# Altium PCB NBP6 Altera Stratix BGA780 Rev1.00.PcbDoc (part 1 of 3)
Units mm, origin at the board's own origin, x right, y up, seen from the top; angles counter-clockwise.
Board outline 69 x 80.99 mm, 6 copper layers (Top Layer, Upper, lower, VCC_PLANE, GND_PLANE, Bottom Layer); 92 components, 279 nets, 1271 pads, 560 vias.
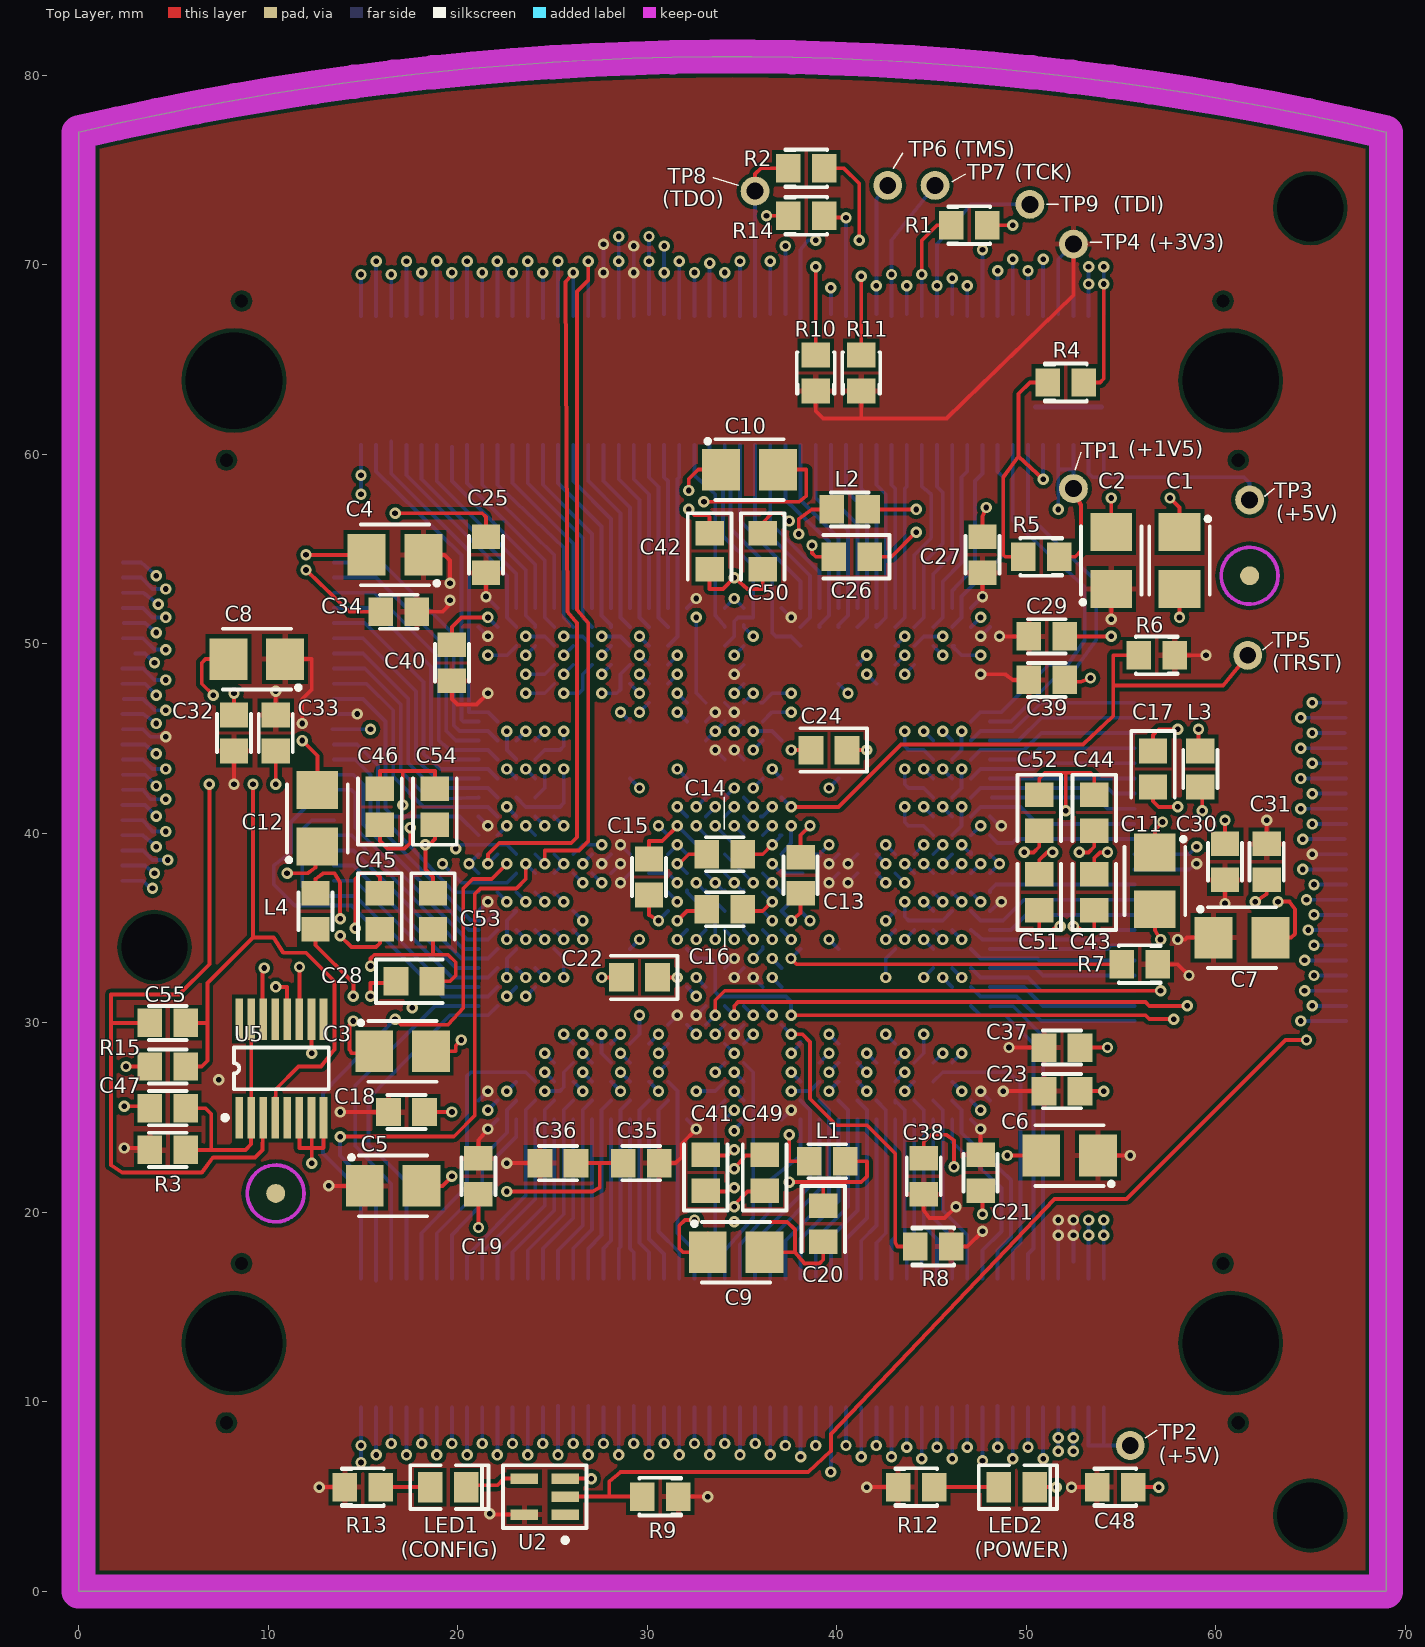
[diagram p0: Top Layer view]
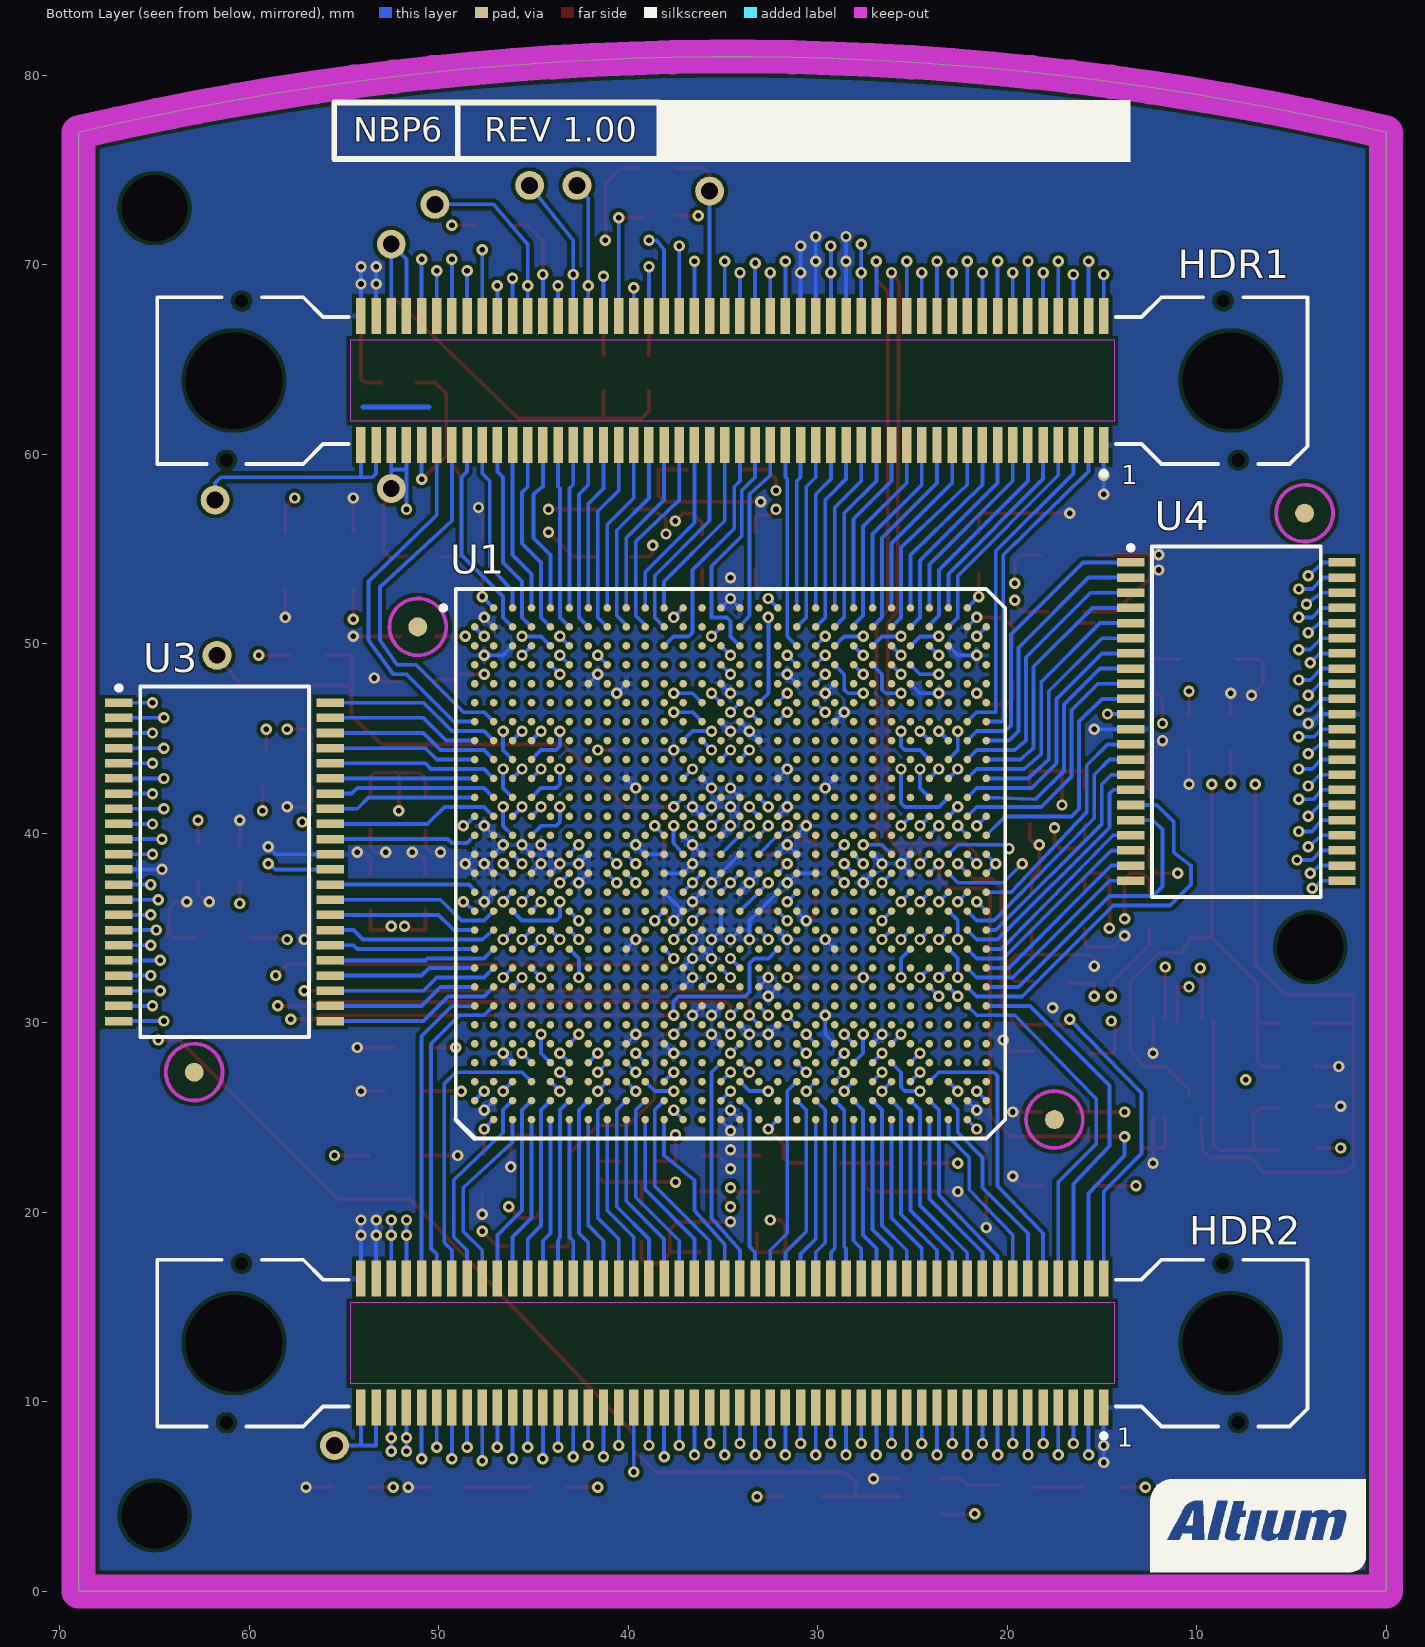
[diagram p1: Bottom Layer view, seen from below]
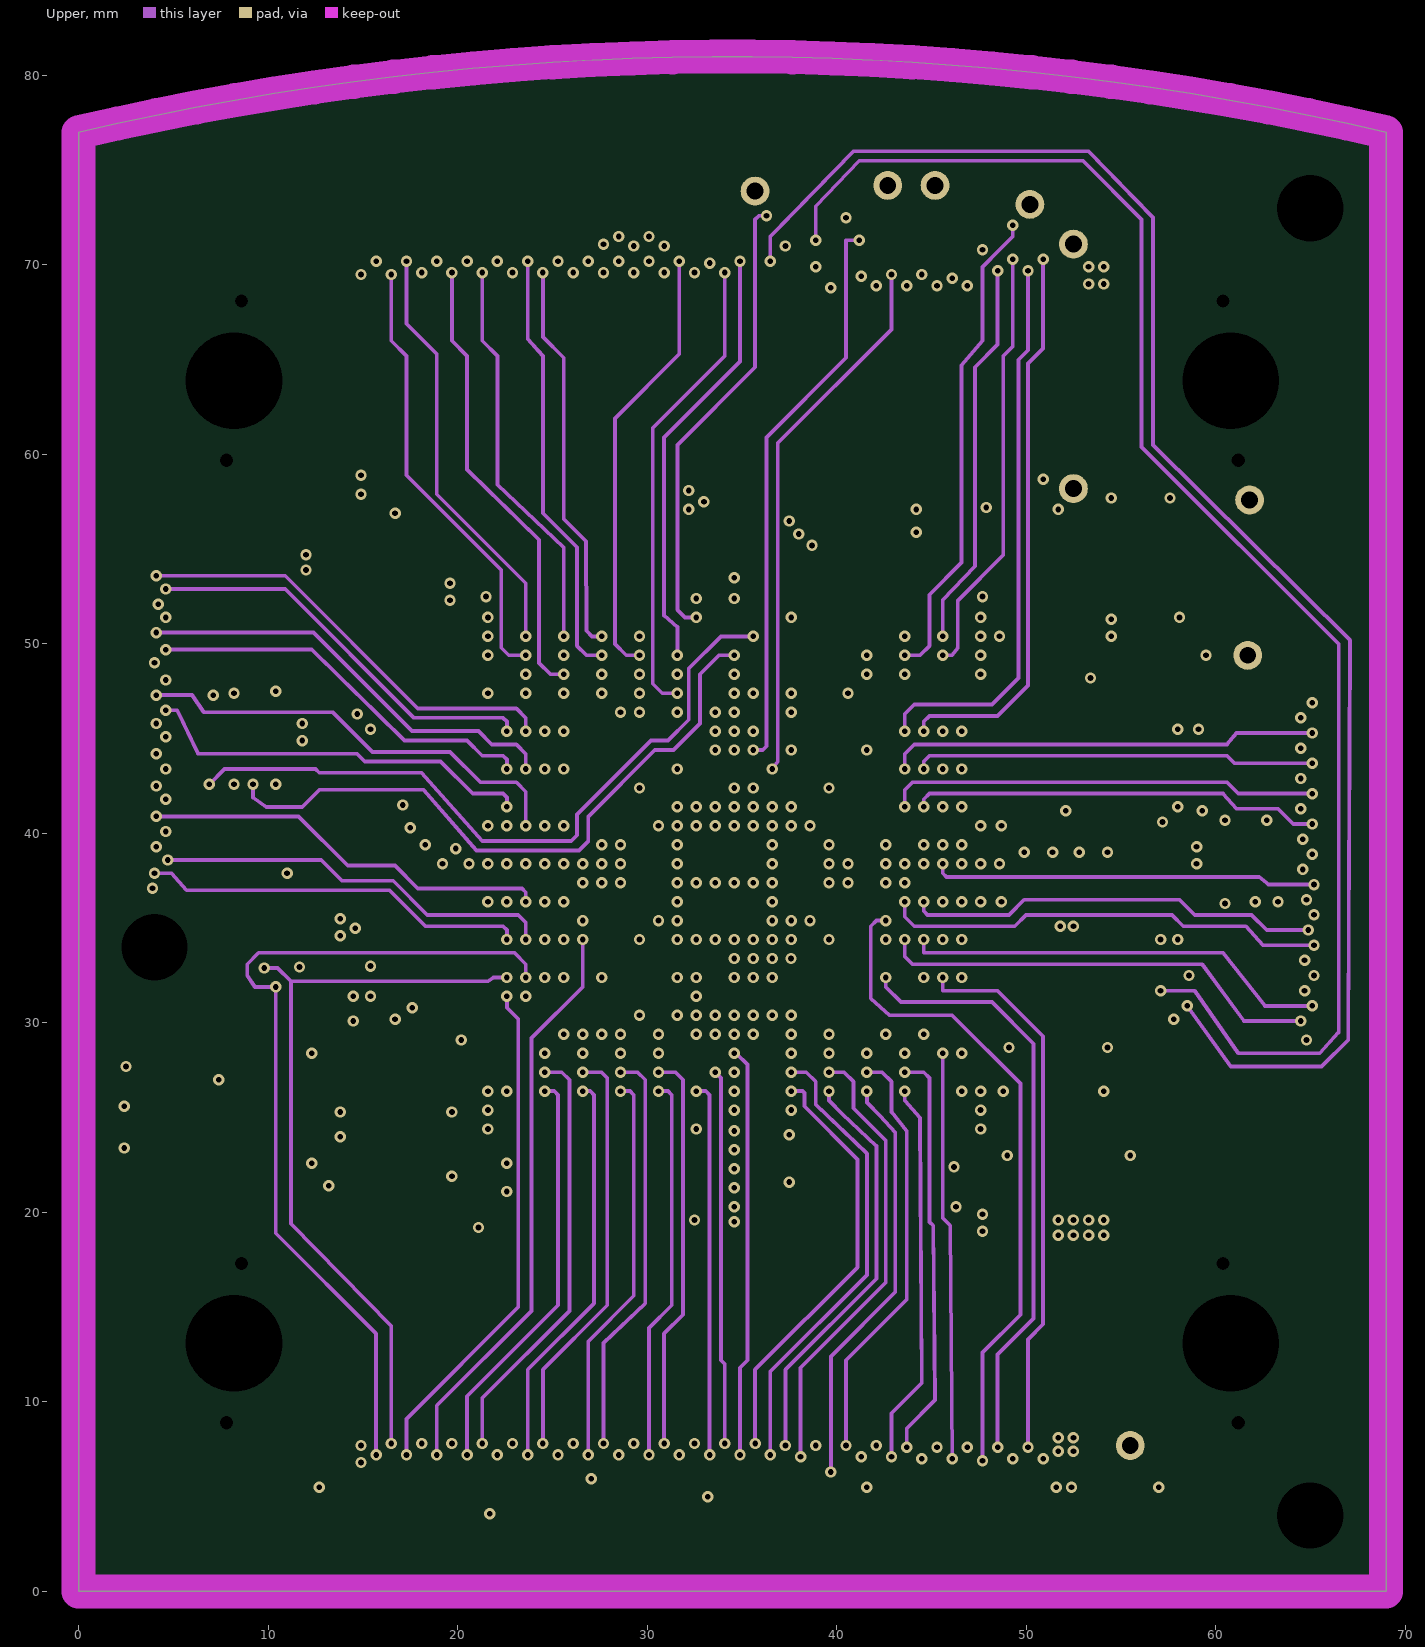
[diagram p2: Upper]
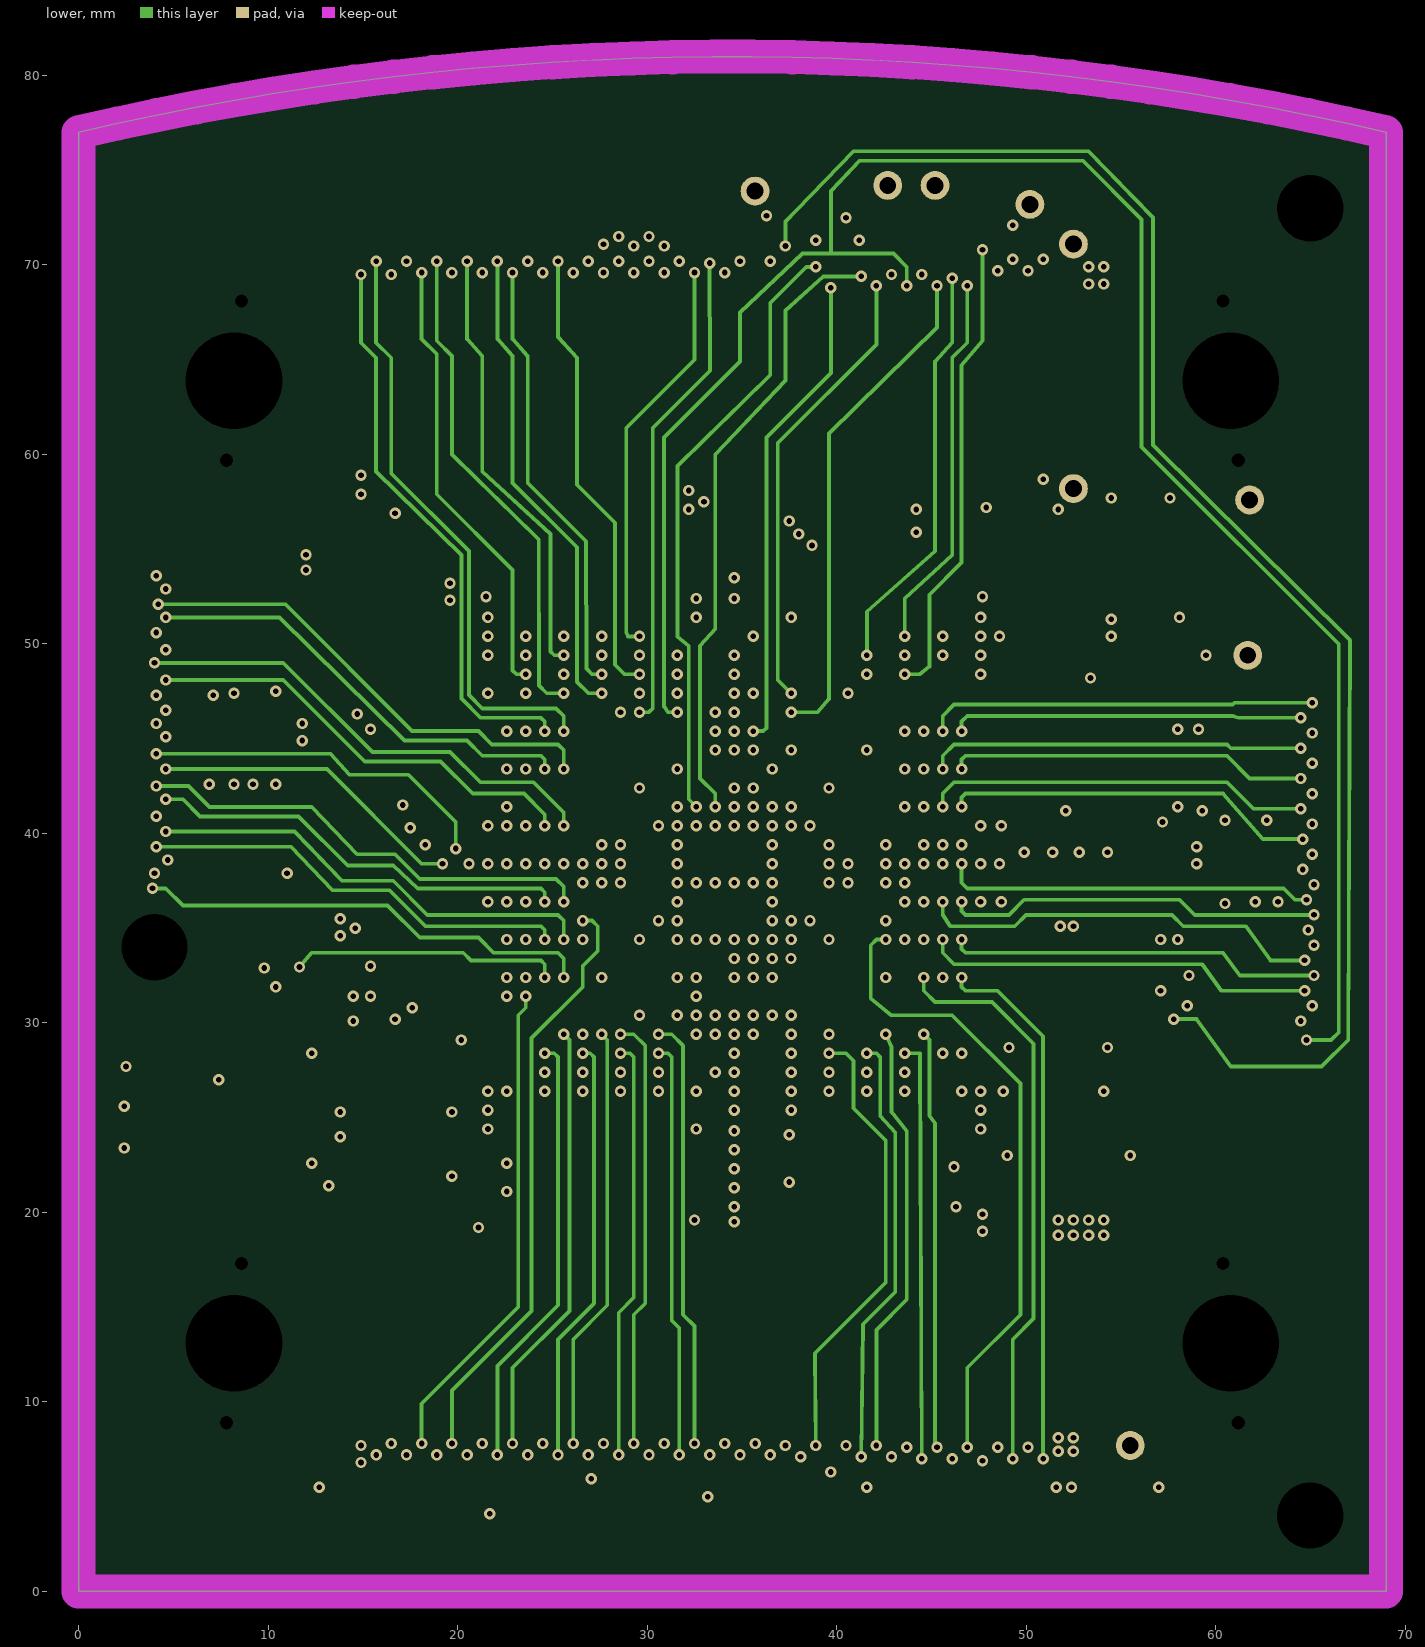
[diagram p3: lower]
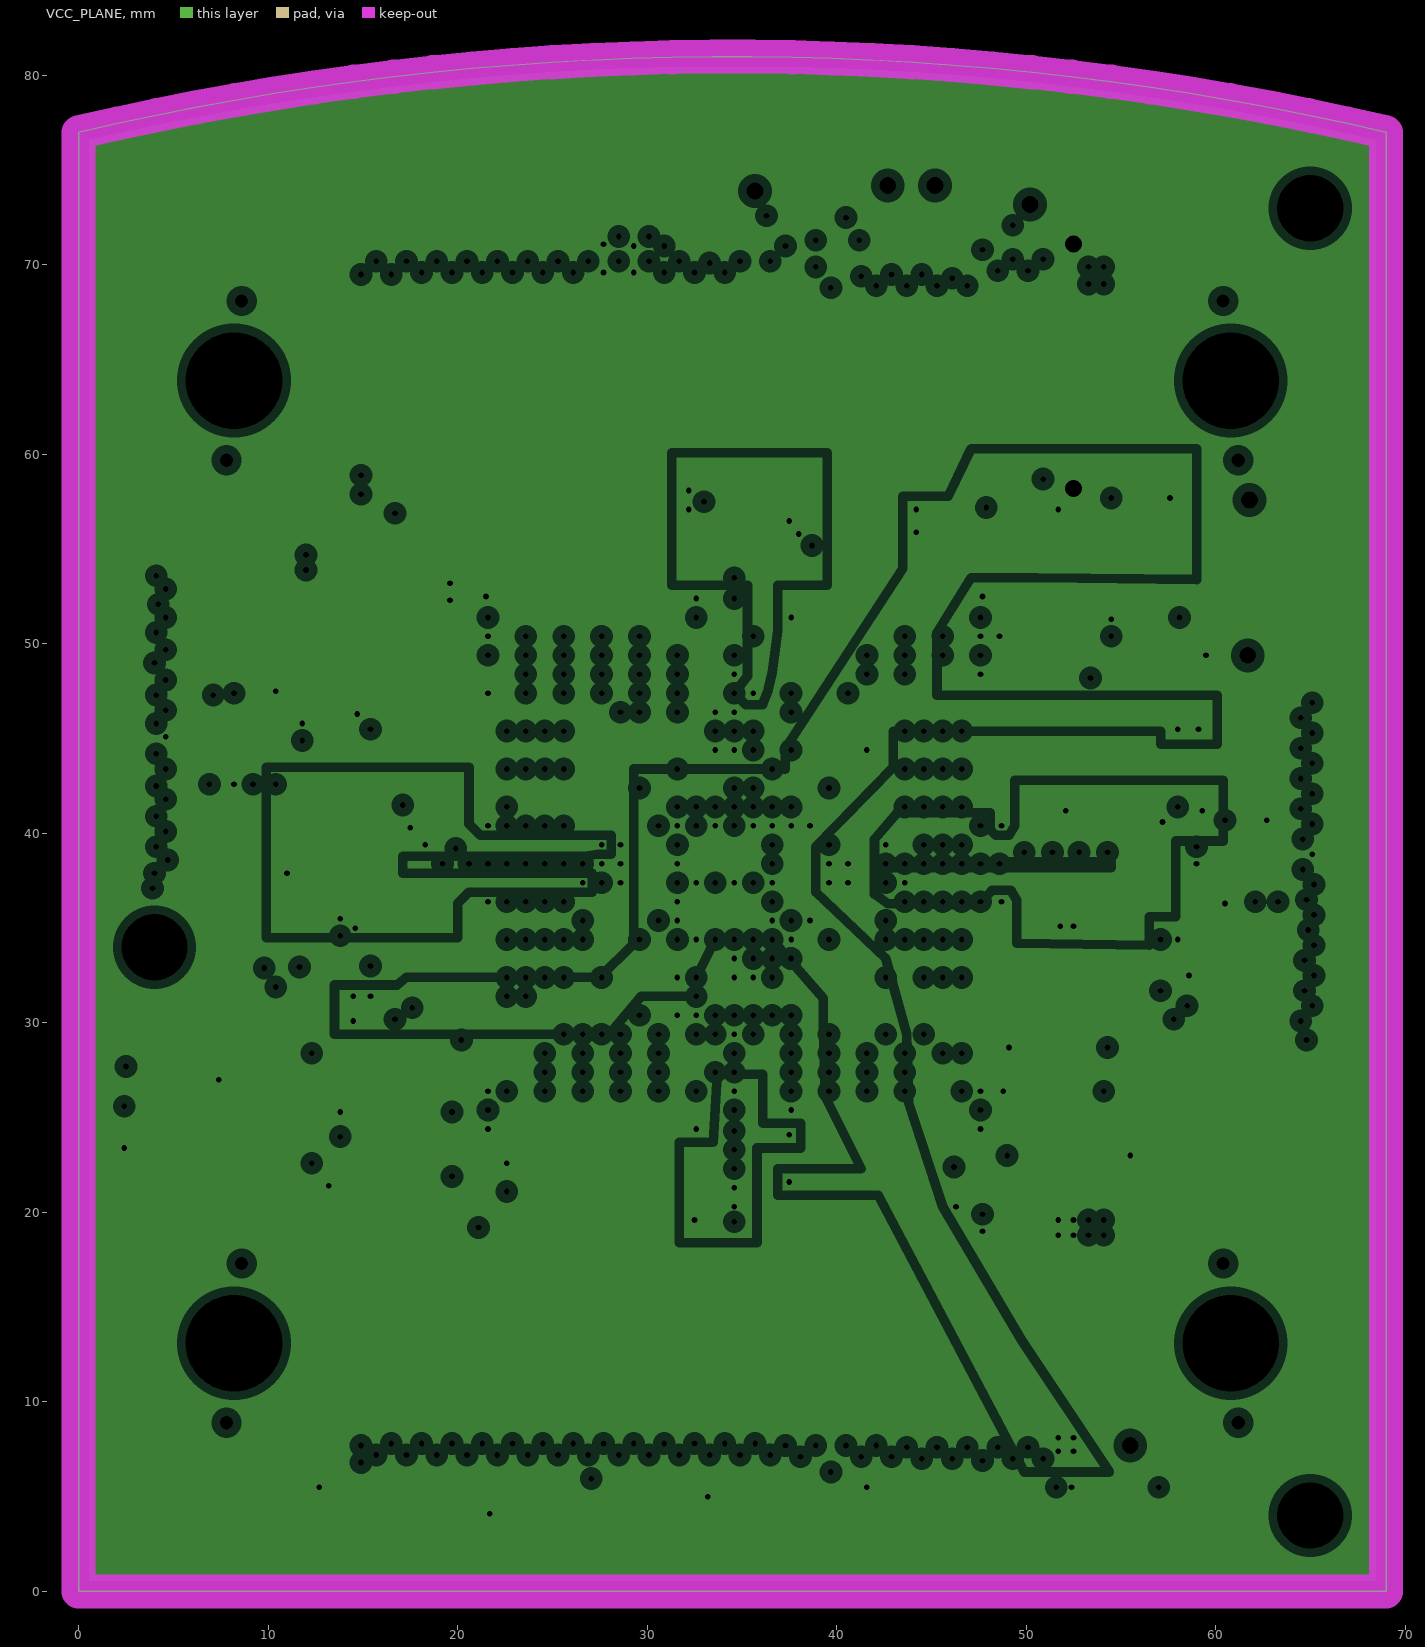
[diagram p4: VCC_PLANE, clearances drawn from the general rule]
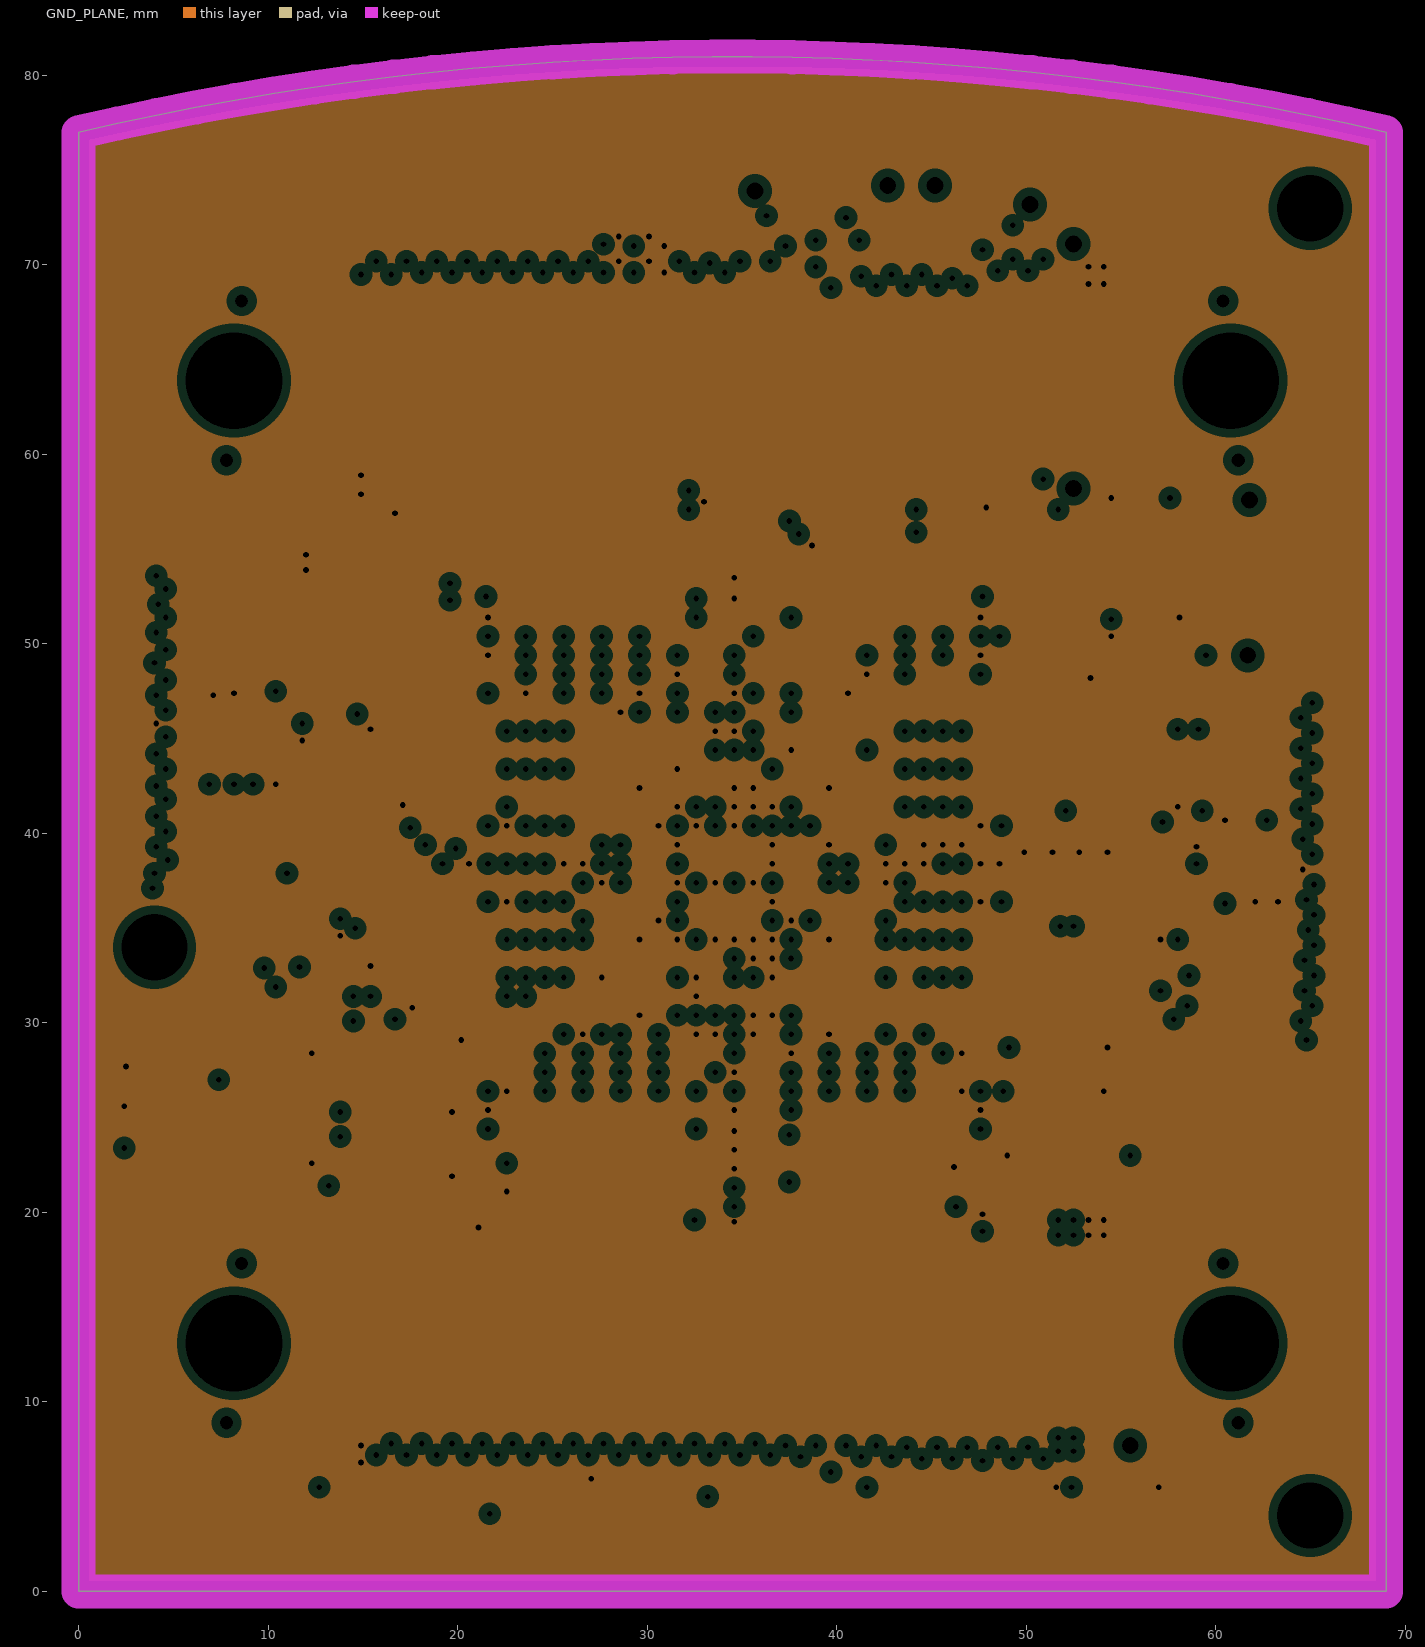
[diagram p5: GND_PLANE, clearances drawn from the general rule]

## Layer stack, top to bottom
Top Layer: signal copper 0.0356
Dielectric: core 0.32, FR-4, Dk 4.8
Upper: signal copper 0.0356
Dielectric: prepreg 0.32, FR-4, Dk 4.8
lower: signal copper 0.0356
Dielectric: core 0.32, FR-4, Dk 4.8
VCC_PLANE: plane copper 0.0356, net (Multiple Nets)
Dielectric: prepreg 0.32, FR-4, Dk 4.8
GND_PLANE: plane copper 0.0356, net GND
Dielectric: core 0.32, FR-4, Dk 4.8
Bottom Layer: signal copper 0.0356

## Board outline
0,0 0.001,77 cw(c34.5,-69.801) 69,77 69,0

## Design rules (kind name [scope] priority, off if disabled: settings)
Clearance Clearance_Polygons [InPolygon] p1: gap=0.2
ComponentClearance [All] p1: gap=0.2 collisioncheckmode=3 verticalgap=0.254 showdistances=FALSE
FabricationTestPointUsage TestPointUsage [All] p1 off: valid=0 allowmultiple=FALSE
FabricationTestpoint Testpoint [All] p1 off: side=3 testpointundercomponent=TRUE minsize=1.016 maxsize=2.54 preferedsize=1.524 minholesize=0 maxholesize=1.016 preferedholesize=0.813 testpointgrid=0.025 allowsidetop=TRUE allowsidebottom=TRUE usegrid=TRUE gridtolerance=0
HoleSize [All] p1: absolutevalues=TRUE maxlimit=5.2 minlimit=0.25 maxpercent=80.000 minpercent=20.000
PlaneClearance [All] p1: clearance=0.45
PlaneConnect [All] p1: planeconnectstyle=Direct reliefexpansion=0.5 reliefentries=4 reliefconductorwidth=0.25 reliefairgap=0.25
PolygonConnect [All] p1: connectstyle=Relief reliefconductorwidth=0.3 reliefentries=4 polygonreliefangle="90 Angle"
RoutingVias [All] p1: holewidth=0.3 width=0.6 viastyle="Through Hole" minholewidth=0.3 minwidth=0.6 maxholewidth=0.5 maxwidth=1.4
SMDNeckDown [All] p1: percent=100.000
SilkscreenOverComponentPads [All] p1: minsilkscreentomaskgap=0.254
SolderMaskExpansion SolderMaskExpansion_Vias [IsVia] p1: expansion=-0.4
SolderMaskExpansion [All] p2: expansion=0.1
Width [All] p1: maxlimit=1.4 minlimit=0.2 preferedwidth=0.2
21 further rules are at their usual default settings.

## Components (designator, comment, footprint, x,y, rotation, side; value= is the part's Value field where it differs from the comment)
C1 "10uF" MCCT-B 58.1,54.4 r270 top
C2 "10uF" MCCT-B 54.5,54.4 r90 top
C3 "10uF" MCCT-B 17.1,28.5 r0 top
C4 "10uF" MCCT-B 16.7,54.7 r180 top
C5 "10uF" MCCT-B 16.6,21.4 r0 top
C6 "10uF" MCCT-B 52.3,23 r180 top
C7 "10uF" MCCT-B 61.4,34.5 r0 top
C8 "10uF" MCCT-B 9.4,49.2 r180 top
C9 "10uF" MCCT-B 34.7,17.9 r0 top
C10 "10uF" MCCT-B 35.4,59.2 r0 top
C11 "10uF" MCCT-B 56.8,37.5 r270 top
C12 "10uF" MCCT-B 12.6,40.8 r90 top
C13 "0.1uF" CC2012-0805 38.1,37.8 r270 top locked
C14 "0.1uF" CC2012-0805 34.1,38.9 r0 top locked
C15 "0.1uF" CC2012-0805 30.1,37.7 r270 top locked
C16 "0.1uF" CC2012-0805 34.1,36 r0 top
C17 "0.1uF" CC2012-0805 56.7,43.4 r270 top
C18 "0.1uF" CC2012-0805 17.3,25.3 r0 top
C19 "0.1uF" CC2012-0805 21.1,21.9 r270 top
C20 "0.1uF" CC2012-0805 39.3,19.4 r270 top
C21 "0.1uF" CC2012-0805 47.6,22.1 r270 top
C22 "0.1uF" CC2012-0805 29.6,32.4 r180 top
C23 "0.1uF" CC2012-0805 51.9,26.4 r0 top
C24 "0.1uF" CC2012-0805 39.6,44.4 r180 top
C25 "0.1uF" CC2012-0805 21.5,54.7 r90 top
C26 "0.1uF" CC2012-0805 40.8,54.6 r180 top
C27 "0.1uF" CC2012-0805 47.7,54.7 r90 top
C28 "0.1uF" CC2012-0805 17.7,32.2 r0 top
C29 "0.1uF" CC2012-0805 51.1,50.4 r0 top
C30 "0.1uF" CC2012-0805 60.5,38.5 r90 top
C31 "0.1uF" CC2012-0805 62.7,38.5 r270 top
C32 "0.1uF" CC2012-0805 8.2,45.3 r90 top
C33 "0.1uF" CC2012-0805 10.4,45.3 r270 top
C34 "0.1uF" CC2012-0805 16.9,51.7 r180 top
C35 "0.1uF" CC2012-0805 29.7,22.6 r180 top
C36 "0.1uF" CC2012-0805 25.3,22.6 r0 top
C37 "0.1uF" CC2012-0805 51.9,28.7 r0 top
C38 "0.1uF" CC2012-0805 44.6,21.9 r90 top
C39 "0.1uF" CC2012-0805 51.1,48.1 r0 top
C40 "0.1uF" CC2012-0805 19.7,49 r90 top
C41 "0.1uF" CC2012-0805 33.1,22.1 r90 top
C42 "0.1uF" CC2012-0805 33.3,54.9 r270 top
C43 "0.1uF" CC2012-0805 53.6,36.9 r90 top
C44 "0.1uF" CC2012-0805 53.6,41.1 r270 top
C45 "0.1uF" CC2012-0805 15.9,35.9 r270 top
C46 "0.1uF" CC2012-0805 15.9,41.4 r90 top
C47 "0.1uF" CC2012-0805 4.7,25.5 r180 top
C48 "0.1uF" CC2012-0805 54.7,5.5 r0 top
C49 "0.001uF" CC2012-0805 36.2,22.1 r90 top
C50 "0.001uF" CC2012-0805 36.1,54.9 r270 top
C51 "0.001uF" CC2012-0805 50.7,36.9 r90 top
C52 "0.001uF" CC2012-0805 50.7,41.1 r270 top
C53 "0.001uF" CC2012-0805 18.7,35.9 r270 top
C54 "0.001uF" CC2012-0805 18.8,41.4 r90 top
C55 "10nF" CC2012-0805 4.7,30 r180 top
HDR1 "54075-1009-HD1" 54075 34.5,63.9 r0 bottom locked
HDR2 "54075-1009-HD2" 54075 34.5,13.1 r0 bottom locked
L1 "Ferrite Bead 50Mhz" CC2012-0805 39.5,22.7 r180 top
L2 "Ferrite Bead 50Mhz" CC2012-0805 40.7,57.1 r180 top
L3 "Ferrite Bead 50Mhz" CC2012-0805 59.2,43.4 r270 top
L4 "Ferrite Bead 50Mhz" CC2012-0805 12.5,35.9 r90 top
LED1 "HSMG-C170" "SMD _LED" 19.5,5.5 r180 top locked
LED2 "HSMH-C170" "SMD _LED" 49.5,5.5 r180 top locked
R1 "100R" CC2012-0805 47,72.1 r0 top
R2 "100R" CC2012-0805 38.4,75.1 r0 top
R3 "100R" CC2012-0805 4.7,23.3 r0 top
R4 "47R" CC2012-0805 52.1,63.8 r0 top
R5 "DO NOT INSTALL" CC2012-0805 50.8,54.6 r180 top
R6 "4K7" CC2012-0805 56.9,49.4 r180 top
R7 "4K7" CC2012-0805 56,33.1 r180 top
R8 "4K7" CC2012-0805 45.1,18.2 r0 top
R9 "4K7" CC2012-0805 30.7,5 r180 top
R10 "4K7" CC2012-0805 38.9,64.3 r90 top
R11 "4K7" CC2012-0805 41.3,64.3 r90 top
R12 "270R" CC2012-0805 44.2,5.5 r0 top
R13 "270R" CC2012-0805 15,5.5 r0 top
R14 "33R" CC2012-0805 38.4,72.6 r0 top
R15 "1M" CC2012-0805 4.7,27.7 r0 top
TP1 "TestPin" TestPin 52.5,58.2 r90 top
TP2 "TestPin" TestPin 55.5,7.7 r90 top
TP3 "TestPin" TestPin 61.8,57.6 r90 top
TP4 "TestPin" TestPin 52.5,71.1 r90 top
TP5 "TestPin" TestPin 61.7,49.4 r90 top
TP6 "TestPin" TestPin 42.7,74.2 r90 top
TP7 "TestPin" TestPin 45.2,74.2 r90 top
TP8 "TestPin" TestPin 35.7,73.9 r90 top
TP9 "TestPin" TestPin 50.2,73.2 r90 top
U1 "EP1S10F780I7" FBGA780 34.6,38.4 r180 bottom locked
U2 "SN74LVC1G04DBV" SO-G5/P.95 24.6,5 r90 top
U3 "SRAM 512Kx16 TSOP44" SO-G44/P.8 61.3,38.5 r270 bottom locked
U4 "SRAM 512Kx16 TSOP44" SO-G44/P.8 7.9,45.9 r270 bottom locked
U5 "MAX1617DBR2" QSOP16 10.7,27.6 r0 top

## Footprints (in the part's own frame and the unit in brackets; to place one, negate y for a bottom-side part, rotate by r counter-clockwise, add the part's x,y. Pads: shape width x height; smd on the part's side, far side on the other; paste and mask are expansions set on the pad)
54075 [mm] "Connector; Docking Station, Receptacle; 100 Position; Vertical"
  rect 0.5x1.9 smd: 1(-19.6,3.4) 2(-19.6,-3.4) 3(-18.8,3.4) 4(-18.8,-3.4) 5(-18,3.4) 6(-18,-3.4) 7(-17.2,3.4) 8(-17.2,-3.4) 9(-16.4,3.4) 10(-16.4,-3.4) 11(-15.6,3.4) 12(-15.6,-3.4) 13(-14.8,3.4) 14(-14.8,-3.4) 15(-14,3.4) 16(-14,-3.4) 17(-13.2,3.4) 18(-13.2,-3.4) 19(-12.4,3.4) 20(-12.4,-3.4) 21(-11.6,3.4) 22(-11.6,-3.4) 23(-10.8,3.4) 24(-10.8,-3.4) 25(-10,3.4) 26(-10,-3.4) 27(-9.2,3.4) 28(-9.2,-3.4) 29(-8.4,3.4) 30(-8.4,-3.4) 31(-7.6,3.4) 32(-7.6,-3.4) 33(-6.8,3.4) 34(-6.8,-3.4) 35(-6,3.4) 36(-6,-3.4) 37(-5.2,3.4) 38(-5.2,-3.4) 39(-4.4,3.4) 40(-4.4,-3.4) 41(-3.6,3.4) 42(-3.6,-3.4) 43(-2.8,3.4) 44(-2.8,-3.4) 45(-2,3.4) 46(-2,-3.4) 47(-1.2,3.4) 48(-1.2,-3.4) 49(-0.4,3.4) 50(-0.4,-3.4) 51(0.4,3.4) 52(0.4,-3.4) 53(1.2,3.4) 54(1.2,-3.4) 55(2,3.4) 56(2,-3.4) 57(2.8,3.4) 58(2.8,-3.4) 59(3.6,3.4) 60(3.6,-3.4) 61(4.4,3.4) 62(4.4,-3.4) 63(5.2,3.4) 64(5.2,-3.4) 65(6,3.4) 66(6,-3.4) 67(6.8,3.4) 68(6.8,-3.4) 69(7.6,3.4) 70(7.6,-3.4) 71(8.4,3.4) 72(8.4,-3.4) 73(9.2,3.4) 74(9.2,-3.4) 75(10,3.4) 76(10,-3.4) 77(10.8,3.4) 78(10.8,-3.4) 79(11.6,3.4) 80(11.6,-3.4) 81(12.4,3.4) 82(12.4,-3.4) 83(13.2,3.4) 84(13.2,-3.4) 85(14,3.4) 86(14,-3.4) 87(14.8,3.4) 88(14.8,-3.4) 89(15.6,3.4) 90(15.6,-3.4) 91(16.4,3.4) 92(16.4,-3.4) 93(17.2,3.4) 94(17.2,-3.4) 95(18,3.4) 96(18,-3.4) 97(18.8,3.4) 98(18.8,-3.4) 99(19.6,3.4) 100(19.6,-3.4)
  round 0.5 hole 0.7 unplated: MH1(-26.7,4.2) MH2(-25.9,-4.2) MH3(26.7,4.2) MH4(25.9,-4.2)
  round 4.8 hole 5.1 unplated: MH5(-26.3,0) MH6(26.3,0)
  Top Layer keep-out region: -20.15,2.15 20.15,2.15 20.15,-2.15 -20.15,-2.15
  silkscreen extent -30.35,-4.4 30.35,5.02
CC2012-0805 [mm]
  rect 1.3x1.5 smd: 1(-0.95,0) 2(0.95,0)
  silkscreen extent -1,-0.9 1,0.9
FBGA780 [mm] "780-Pin Thermally Enhanced FineLine Ball-Grid Array (FBGA)"
  round 0.4 smd: A2(-12.5,13.5) A3(-11.5,13.5) A4(-10.5,13.5) A5(-9.5,13.5) A6(-8.5,13.5) A7(-7.5,13.5) A8(-6.5,13.5) A9(-5.5,13.5) A10(-4.5,13.5) A11(-3.5,13.5) A12(-2.5,13.5) A13(-1.5,13.5) A14(-0.5,13.5) A15(0.5,13.5) A16(1.5,13.5) A17(2.5,13.5) A18(3.5,13.5) A19(4.5,13.5) A20(5.5,13.5) A21(6.5,13.5) A22(7.5,13.5) A23(8.5,13.5) A24(9.5,13.5) A25(10.5,13.5) A26(11.5,13.5) A27(12.5,13.5) AA1(-13.5,-6.5) AA2(-12.5,-6.5) AA3(-11.5,-6.5) AA4(-10.5,-6.5) AA5(-9.5,-6.5) AA6(-8.5,-6.5) AA7(-7.5,-6.5) AA8(-6.5,-6.5) AA9(-5.5,-6.5) AA10(-4.5,-6.5) AA11(-3.5,-6.5) AA12(-2.5,-6.5) AA13(-1.5,-6.5) AA14(-0.5,-6.5) AA15(0.5,-6.5) AA16(1.5,-6.5) AA17(2.5,-6.5) AA18(3.5,-6.5) AA19(4.5,-6.5) AA20(5.5,-6.5) AA21(6.5,-6.5) AA22(7.5,-6.5) AA23(8.5,-6.5) AA24(9.5,-6.5) AA25(10.5,-6.5) AA26(11.5,-6.5) AA27(12.5,-6.5) AA28(13.5,-6.5) AB1(-13.5,-7.5) AB2(-12.5,-7.5) AB3(-11.5,-7.5) AB4(-10.5,-7.5) AB5(-9.5,-7.5) AB6(-8.5,-7.5) AB7(-7.5,-7.5) AB8(-6.5,-7.5) AB9(-5.5,-7.5) AB10(-4.5,-7.5) AB11(-3.5,-7.5) AB12(-2.5,-7.5) AB13(-1.5,-7.5) AB14(-0.5,-7.5) AB15(0.5,-7.5) AB16(1.5,-7.5) AB17(2.5,-7.5) AB18(3.5,-7.5) AB19(4.5,-7.5) AB20(5.5,-7.5) AB21(6.5,-7.5) AB22(7.5,-7.5) AB23(8.5,-7.5) AB24(9.5,-7.5) AB25(10.5,-7.5) AB26(11.5,-7.5) AB27(12.5,-7.5) AB28(13.5,-7.5) AC1(-13.5,-8.5) AC2(-12.5,-8.5) AC3(-11.5,-8.5) AC4(-10.5,-8.5) AC5(-9.5,-8.5) AC6(-8.5,-8.5) AC7(-7.5,-8.5) AC8(-6.5,-8.5) AC9(-5.5,-8.5) AC10(-4.5,-8.5) AC11(-3.5,-8.5) AC12(-2.5,-8.5) AC13(-1.5,-8.5) AC14(-0.5,-8.5) AC15(0.5,-8.5) AC16(1.5,-8.5) AC17(2.5,-8.5) AC18(3.5,-8.5) AC19(4.5,-8.5) AC20(5.5,-8.5) AC21(6.5,-8.5) AC22(7.5,-8.5) AC23(8.5,-8.5) AC24(9.5,-8.5) AC25(10.5,-8.5) AC26(11.5,-8.5) AC27(12.5,-8.5) AC28(13.5,-8.5) AD1(-13.5,-9.5) AD2(-12.5,-9.5) AD3(-11.5,-9.5) AD4(-10.5,-9.5) AD5(-9.5,-9.5) AD6(-8.5,-9.5) AD7(-7.5,-9.5) AD8(-6.5,-9.5) AD9(-5.5,-9.5) AD10(-4.5,-9.5) AD11(-3.5,-9.5) AD12(-2.5,-9.5) AD13(-1.5,-9.5) AD14(-0.5,-9.5) AD15(0.5,-9.5) AD16(1.5,-9.5) AD17(2.5,-9.5) AD18(3.5,-9.5) AD19(4.5,-9.5) AD20(5.5,-9.5) AD21(6.5,-9.5) AD22(7.5,-9.5) AD23(8.5,-9.5) AD24(9.5,-9.5) AD25(10.5,-9.5) AD26(11.5,-9.5) AD27(12.5,-9.5) AD28(13.5,-9.5) AE1(-13.5,-10.5) AE2(-12.5,-10.5) AE3(-11.5,-10.5) AE4(-10.5,-10.5) AE5(-9.5,-10.5) AE6(-8.5,-10.5) AE7(-7.5,-10.5) AE8(-6.5,-10.5) AE9(-5.5,-10.5) AE10(-4.5,-10.5) AE11(-3.5,-10.5) AE12(-2.5,-10.5) AE13(-1.5,-10.5) AE14(-0.5,-10.5) AE15(0.5,-10.5) AE16(1.5,-10.5) AE17(2.5,-10.5) AE18(3.5,-10.5) AE19(4.5,-10.5) AE20(5.5,-10.5) AE21(6.5,-10.5) AE22(7.5,-10.5) AE23(8.5,-10.5) AE24(9.5,-10.5) AE25(10.5,-10.5) AE26(11.5,-10.5) AE27(12.5,-10.5) AE28(13.5,-10.5) AF1(-13.5,-11.5) AF2(-12.5,-11.5) AF3(-11.5,-11.5) AF4(-10.5,-11.5) AF5(-9.5,-11.5) AF6(-8.5,-11.5) AF7(-7.5,-11.5) AF8(-6.5,-11.5) AF9(-5.5,-11.5) AF10(-4.5,-11.5) AF11(-3.5,-11.5) AF12(-2.5,-11.5) AF13(-1.5,-11.5) AF14(-0.5,-11.5) AF15(0.5,-11.5) AF16(1.5,-11.5) AF17(2.5,-11.5) AF18(3.5,-11.5) AF19(4.5,-11.5) AF20(5.5,-11.5) AF21(6.5,-11.5) AF22(7.5,-11.5) AF23(8.5,-11.5) AF24(9.5,-11.5) AF25(10.5,-11.5) AF26(11.5,-11.5) AF27(12.5,-11.5) AF28(13.5,-11.5) AG1(-13.5,-12.5) AG2(-12.5,-12.5) AG3(-11.5,-12.5) AG4(-10.5,-12.5) AG5(-9.5,-12.5) AG6(-8.5,-12.5) AG7(-7.5,-12.5) AG8(-6.5,-12.5) AG9(-5.5,-12.5) AG10(-4.5,-12.5) AG11(-3.5,-12.5) AG12(-2.5,-12.5) AG13(-1.5,-12.5) AG14(-0.5,-12.5) AG15(0.5,-12.5) AG16(1.5,-12.5) AG17(2.5,-12.5) AG18(3.5,-12.5) AG19(4.5,-12.5) AG20(5.5,-12.5) AG21(6.5,-12.5) AG22(7.5,-12.5) AG23(8.5,-12.5) AG24(9.5,-12.5) AG25(10.5,-12.5) AG26(11.5,-12.5) AG27(12.5,-12.5) AG28(13.5,-12.5) AH2(-12.5,-13.5) AH3(-11.5,-13.5) AH4(-10.5,-13.5) AH5(-9.5,-13.5) AH6(-8.5,-13.5) AH7(-7.5,-13.5) AH8(-6.5,-13.5) AH9(-5.5,-13.5) AH10(-4.5,-13.5) AH11(-3.5,-13.5) AH12(-2.5,-13.5) AH13(-1.5,-13.5) AH14(-0.5,-13.5) AH15(0.5,-13.5) AH16(1.5,-13.5) AH17(2.5,-13.5) AH18(3.5,-13.5) AH19(4.5,-13.5) AH20(5.5,-13.5) AH21(6.5,-13.5) AH22(7.5,-13.5) AH23(8.5,-13.5) AH24(9.5,-13.5) AH25(10.5,-13.5) AH26(11.5,-13.5) AH27(12.5,-13.5) B1(-13.5,12.5) B2(-12.5,12.5) B3(-11.5,12.5) B4(-10.5,12.5) B5(-9.5,12.5) B6(-8.5,12.5) B7(-7.5,12.5) B8(-6.5,12.5) B9(-5.5,12.5) B10(-4.5,12.5) B11(-3.5,12.5) B12(-2.5,12.5) B13(-1.5,12.5) B14(-0.5,12.5) B15(0.5,12.5) B16(1.5,12.5) B17(2.5,12.5) B18(3.5,12.5) B19(4.5,12.5) B20(5.5,12.5) B21(6.5,12.5) B22(7.5,12.5) B23(8.5,12.5) B24(9.5,12.5) B25(10.5,12.5) B26(11.5,12.5) B27(12.5,12.5) B28(13.5,12.5) C1(-13.5,11.5) C2(-12.5,11.5) C3(-11.5,11.5) C4(-10.5,11.5) C5(-9.5,11.5) C6(-8.5,11.5) C7(-7.5,11.5) C8(-6.5,11.5) C9(-5.5,11.5) C10(-4.5,11.5) C11(-3.5,11.5) C12(-2.5,11.5) C13(-1.5,11.5) C14(-0.5,11.5) C15(0.5,11.5) C16(1.5,11.5) C17(2.5,11.5) C18(3.5,11.5) C19(4.5,11.5) C20(5.5,11.5) C21(6.5,11.5) C22(7.5,11.5) C23(8.5,11.5) C24(9.5,11.5) C25(10.5,11.5) C26(11.5,11.5) C27(12.5,11.5) C28(13.5,11.5) D1(-13.5,10.5) D2(-12.5,10.5) D3(-11.5,10.5) D4(-10.5,10.5) D5(-9.5,10.5) D6(-8.5,10.5) D7(-7.5,10.5) D8(-6.5,10.5) D9(-5.5,10.5) D10(-4.5,10.5) D11(-3.5,10.5) D12(-2.5,10.5) D13(-1.5,10.5) D14(-0.5,10.5) D15(0.5,10.5) D16(1.5,10.5) D17(2.5,10.5) D18(3.5,10.5) D19(4.5,10.5) D20(5.5,10.5) D21(6.5,10.5) D22(7.5,10.5) D23(8.5,10.5) D24(9.5,10.5) D25(10.5,10.5) D26(11.5,10.5) D27(12.5,10.5) D28(13.5,10.5) E1(-13.5,9.5) E2(-12.5,9.5) E3(-11.5,9.5) E4(-10.5,9.5) E5(-9.5,9.5) E6(-8.5,9.5) E7(-7.5,9.5) E8(-6.5,9.5) E9(-5.5,9.5) E10(-4.5,9.5) E11(-3.5,9.5) E12(-2.5,9.5) E13(-1.5,9.5) E14(-0.5,9.5) E15(0.5,9.5) E16(1.5,9.5) E17(2.5,9.5) E18(3.5,9.5) E19(4.5,9.5) E20(5.5,9.5) E21(6.5,9.5) E22(7.5,9.5) E23(8.5,9.5) E24(9.5,9.5) E25(10.5,9.5) E26(11.5,9.5) E27(12.5,9.5) E28(13.5,9.5) F1(-13.5,8.5) F2(-12.5,8.5) F3(-11.5,8.5) F4(-10.5,8.5) F5(-9.5,8.5) F6(-8.5,8.5) F7(-7.5,8.5) F8(-6.5,8.5) F9(-5.5,8.5) F10(-4.5,8.5) F11(-3.5,8.5) F12(-2.5,8.5) F13(-1.5,8.5) F14(-0.5,8.5) F15(0.5,8.5) F16(1.5,8.5) F17(2.5,8.5) F18(3.5,8.5) F19(4.5,8.5) F20(5.5,8.5) F21(6.5,8.5) F22(7.5,8.5) F23(8.5,8.5) F24(9.5,8.5) F25(10.5,8.5) F26(11.5,8.5) F27(12.5,8.5) F28(13.5,8.5) G1(-13.5,7.5) G2(-12.5,7.5) G3(-11.5,7.5) G4(-10.5,7.5) G5(-9.5,7.5) G6(-8.5,7.5) G7(-7.5,7.5) G8(-6.5,7.5) G9(-5.5,7.5) G10(-4.5,7.5) G11(-3.5,7.5) G12(-2.5,7.5) G13(-1.5,7.5) G14(-0.5,7.5) G15(0.5,7.5) G16(1.5,7.5) G17(2.5,7.5) G18(3.5,7.5) G19(4.5,7.5) G20(5.5,7.5) G21(6.5,7.5) G22(7.5,7.5) G23(8.5,7.5) G24(9.5,7.5) G25(10.5,7.5) G26(11.5,7.5) G27(12.5,7.5) G28(13.5,7.5) H1(-13.5,6.5) H2(-12.5,6.5) H3(-11.5,6.5) H4(-10.5,6.5) H5(-9.5,6.5) H6(-8.5,6.5) H7(-7.5,6.5) H8(-6.5,6.5) H9(-5.5,6.5) H10(-4.5,6.5) H11(-3.5,6.5) H12(-2.5,6.5) H13(-1.5,6.5) H14(-0.5,6.5) H15(0.5,6.5) H16(1.5,6.5) H17(2.5,6.5) H18(3.5,6.5) H19(4.5,6.5) H20(5.5,6.5) H21(6.5,6.5) H22(7.5,6.5) H23(8.5,6.5) H24(9.5,6.5) H25(10.5,6.5) H26(11.5,6.5) H27(12.5,6.5) H28(13.5,6.5) J1(-13.5,5.5) J2(-12.5,5.5) J3(-11.5,5.5) J4(-10.5,5.5) J5(-9.5,5.5) J6(-8.5,5.5) J7(-7.5,5.5) J8(-6.5,5.5) J9(-5.5,5.5) J10(-4.5,5.5) J11(-3.5,5.5) J12(-2.5,5.5) J13(-1.5,5.5) J14(-0.5,5.5) J15(0.5,5.5) J16(1.5,5.5) J17(2.5,5.5) J18(3.5,5.5) J19(4.5,5.5) J20(5.5,5.5) J21(6.5,5.5) J22(7.5,5.5) J23(8.5,5.5) J24(9.5,5.5) J25(10.5,5.5) J26(11.5,5.5) J27(12.5,5.5) J28(13.5,5.5) K1(-13.5,4.5) K2(-12.5,4.5) K3(-11.5,4.5) K4(-10.5,4.5) K5(-9.5,4.5) K6(-8.5,4.5) K7(-7.5,4.5) K8(-6.5,4.5) K9(-5.5,4.5) K10(-4.5,4.5) K11(-3.5,4.5) K12(-2.5,4.5) K13(-1.5,4.5) K14(-0.5,4.5) K15(0.5,4.5) K16(1.5,4.5) K17(2.5,4.5) K18(3.5,4.5) K19(4.5,4.5) K20(5.5,4.5) K21(6.5,4.5) K22(7.5,4.5) K23(8.5,4.5) K24(9.5,4.5) K25(10.5,4.5) K26(11.5,4.5) K27(12.5,4.5) K28(13.5,4.5) L1(-13.5,3.5) L2(-12.5,3.5) L3(-11.5,3.5) L4(-10.5,3.5) L5(-9.5,3.5) L6(-8.5,3.5) L7(-7.5,3.5) L8(-6.5,3.5) L9(-5.5,3.5) L10(-4.5,3.5) L11(-3.5,3.5) L12(-2.5,3.5) L13(-1.5,3.5) L14(-0.5,3.5) L15(0.5,3.5) L16(1.5,3.5) L17(2.5,3.5) L18(3.5,3.5) L19(4.5,3.5) L20(5.5,3.5) L21(6.5,3.5) L22(7.5,3.5) L23(8.5,3.5) L24(9.5,3.5) L25(10.5,3.5) L26(11.5,3.5) L27(12.5,3.5) L28(13.5,3.5) M1(-13.5,2.5) M2(-12.5,2.5) M3(-11.5,2.5) M4(-10.5,2.5) M5(-9.5,2.5) M6(-8.5,2.5) M7(-7.5,2.5) M8(-6.5,2.5) M9(-5.5,2.5) M10(-4.5,2.5) M11(-3.5,2.5) M12(-2.5,2.5) M13(-1.5,2.5) M14(-0.5,2.5) M15(0.5,2.5) M16(1.5,2.5) M17(2.5,2.5) M18(3.5,2.5) M19(4.5,2.5) M20(5.5,2.5) M21(6.5,2.5) M22(7.5,2.5) M23(8.5,2.5) M24(9.5,2.5) M25(10.5,2.5) M26(11.5,2.5) M27(12.5,2.5) M28(13.5,2.5) N1(-13.5,1.5) N2(-12.5,1.5) N3(-11.5,1.5) N4(-10.5,1.5) N5(-9.5,1.5) N6(-8.5,1.5) N7(-7.5,1.5) N8(-6.5,1.5) N9(-5.5,1.5) N10(-4.5,1.5) N11(-3.5,1.5) N12(-2.5,1.5) N13(-1.5,1.5) N14(-0.5,1.5) N15(0.5,1.5) N16(1.5,1.5) N17(2.5,1.5) N18(3.5,1.5) N19(4.5,1.5) N20(5.5,1.5) N21(6.5,1.5) N22(7.5,1.5) N23(8.5,1.5) N24(9.5,1.5) N25(10.5,1.5) N26(11.5,1.5) N27(12.5,1.5) N28(13.5,1.5) P1(-13.5,0.5) P2(-12.5,0.5) P3(-11.5,0.5) P4(-10.5,0.5) P5(-9.5,0.5) P6(-8.5,0.5) P7(-7.5,0.5) P8(-6.5,0.5) P9(-5.5,0.5) P10(-4.5,0.5) P11(-3.5,0.5) P12(-2.5,0.5) P13(-1.5,0.5) P14(-0.5,0.5) P15(0.5,0.5) P16(1.5,0.5) P17(2.5,0.5) P18(3.5,0.5) P19(4.5,0.5) P20(5.5,0.5) P21(6.5,0.5) P22(7.5,0.5) P23(8.5,0.5) P24(9.5,0.5) P25(10.5,0.5) P26(11.5,0.5) P27(12.5,0.5) P28(13.5,0.5) R1(-13.5,-0.5) R2(-12.5,-0.5) R3(-11.5,-0.5) R4(-10.5,-0.5) R5(-9.5,-0.5) R6(-8.5,-0.5) R7(-7.5,-0.5) R8(-6.5,-0.5) R9(-5.5,-0.5) R10(-4.5,-0.5) R11(-3.5,-0.5) R12(-2.5,-0.5) R13(-1.5,-0.5) R14(-0.5,-0.5) R15(0.5,-0.5) R16(1.5,-0.5) R17(2.5,-0.5) R18(3.5,-0.5) R19(4.5,-0.5) R20(5.5,-0.5) R21(6.5,-0.5) R22(7.5,-0.5) R23(8.5,-0.5) R24(9.5,-0.5) R25(10.5,-0.5) R26(11.5,-0.5) R27(12.5,-0.5) R28(13.5,-0.5) T1(-13.5,-1.5) T2(-12.5,-1.5) T3(-11.5,-1.5) T4(-10.5,-1.5) T5(-9.5,-1.5) T6(-8.5,-1.5) T7(-7.5,-1.5) T8(-6.5,-1.5) T9(-5.5,-1.5) T10(-4.5,-1.5) T11(-3.5,-1.5) T12(-2.5,-1.5) T13(-1.5,-1.5) T14(-0.5,-1.5) T15(0.5,-1.5) T16(1.5,-1.5) T17(2.5,-1.5) T18(3.5,-1.5) T19(4.5,-1.5) T20(5.5,-1.5) T21(6.5,-1.5) T22(7.5,-1.5) T23(8.5,-1.5) T24(9.5,-1.5) T25(10.5,-1.5) T26(11.5,-1.5) T27(12.5,-1.5) T28(13.5,-1.5) U1(-13.5,-2.5) U2(-12.5,-2.5) U3(-11.5,-2.5) U4(-10.5,-2.5) U5(-9.5,-2.5) U6(-8.5,-2.5) U7(-7.5,-2.5) U8(-6.5,-2.5) U9(-5.5,-2.5) U10(-4.5,-2.5) U11(-3.5,-2.5) U12(-2.5,-2.5) U13(-1.5,-2.5) U14(-0.5,-2.5) U15(0.5,-2.5) U16(1.5,-2.5) U17(2.5,-2.5) U18(3.5,-2.5) U19(4.5,-2.5) U20(5.5,-2.5) U21(6.5,-2.5) U22(7.5,-2.5) U23(8.5,-2.5) U24(9.5,-2.5) U25(10.5,-2.5) U26(11.5,-2.5) U27(12.5,-2.5) U28(13.5,-2.5) V1(-13.5,-3.5) V2(-12.5,-3.5) V3(-11.5,-3.5) V4(-10.5,-3.5) V5(-9.5,-3.5) V6(-8.5,-3.5) V7(-7.5,-3.5) V8(-6.5,-3.5) V9(-5.5,-3.5) V10(-4.5,-3.5) V11(-3.5,-3.5) V12(-2.5,-3.5) V13(-1.5,-3.5) V14(-0.5,-3.5) V15(0.5,-3.5) V16(1.5,-3.5) V17(2.5,-3.5) V18(3.5,-3.5) V19(4.5,-3.5) V20(5.5,-3.5) V21(6.5,-3.5) V22(7.5,-3.5) V23(8.5,-3.5) V24(9.5,-3.5) V25(10.5,-3.5) V26(11.5,-3.5) V27(12.5,-3.5) V28(13.5,-3.5) W1(-13.5,-4.5) W2(-12.5,-4.5) W3(-11.5,-4.5) W4(-10.5,-4.5) W5(-9.5,-4.5) W6(-8.5,-4.5) W7(-7.5,-4.5) W8(-6.5,-4.5) W9(-5.5,-4.5) W10(-4.5,-4.5) W11(-3.5,-4.5) W12(-2.5,-4.5) W13(-1.5,-4.5) W14(-0.5,-4.5) W15(0.5,-4.5) W16(1.5,-4.5) W17(2.5,-4.5) W18(3.5,-4.5) W19(4.5,-4.5) W20(5.5,-4.5) W21(6.5,-4.5) W22(7.5,-4.5) W23(8.5,-4.5) W24(9.5,-4.5) W25(10.5,-4.5) W26(11.5,-4.5) W27(12.5,-4.5) W28(13.5,-4.5) Y1(-13.5,-5.5) Y2(-12.5,-5.5) Y3(-11.5,-5.5) Y4(-10.5,-5.5) Y5(-9.5,-5.5) Y6(-8.5,-5.5) Y7(-7.5,-5.5) Y8(-6.5,-5.5) Y9(-5.5,-5.5) Y10(-4.5,-5.5) Y11(-3.5,-5.5) Y12(-2.5,-5.5) Y13(-1.5,-5.5) Y14(-0.5,-5.5) Y15(0.5,-5.5) Y16(1.5,-5.5) Y17(2.5,-5.5) Y18(3.5,-5.5) Y19(4.5,-5.5) Y20(5.5,-5.5) Y21(6.5,-5.5) Y22(7.5,-5.5) Y23(8.5,-5.5) Y24(9.5,-5.5) Y25(10.5,-5.5) Y26(11.5,-5.5) Y27(12.5,-5.5) Y28(13.5,-5.5)
  silkscreen extent -15.28,-14.5 14.5,14.5
MCCT-B [mm]
  rect 2x2.2 smd: 1(-1.5,0) 2(1.5,0)
  silkscreen extent -2.3,-1.6 1.8,1.6
QSOP16 [mm] "SSOP; 16 Leads; Body Width 3.9 mm; Pitch 0.635 mm"
  rect 0.4x2.2 smd: 1(-2.222,-2.6) 2(-1.587,-2.6) 3(-0.953,-2.6) 4(-0.318,-2.6) 5(0.318,-2.6) 6(0.953,-2.6) 7(1.587,-2.6) 8(2.222,-2.6) 9(2.222,2.6) 10(1.587,2.6) 11(0.953,2.6) 12(0.318,2.6) 13(-0.318,2.6) 14(-0.953,2.6) 15(-1.587,2.6) 16(-2.222,2.6)
  silkscreen extent -3.1,-2.72 2.5,1.1
"SMD _LED" [mm]
  rect 1.3x1.6 smd: 1(0.95,0) 2(-0.95,0)
  silkscreen extent -2.13,-1.15 2,1.15
SO-G5/P.95 [mm]
  rect 0.55x1.45 smd: 1(-0.95,-1.075) 2(0,-1.075) 3(0.95,-1.075) 4(0.95,1.075) 5(-0.95,1.075)
  silkscreen extent -2.42,-2.2 1.65,2.2
SO-G44/P.8 [mm]
  rect 0.45x1.45 smd: 1(-8.4,-5.575) 2(-7.6,-5.575) 3(-6.8,-5.575) 4(-6,-5.575) 5(-5.2,-5.575) 6(-4.4,-5.575) 7(-3.6,-5.575) 8(-2.8,-5.575) 9(-2,-5.575) 10(-1.2,-5.575) 11(-0.4,-5.575) 12(0.4,-5.575) 13(1.2,-5.575) 14(2,-5.575) 15(2.8,-5.575) 16(3.6,-5.575) 17(4.4,-5.575) 18(5.2,-5.575) 19(6,-5.575) 20(6.8,-5.575) 21(7.6,-5.575) 22(8.4,-5.575) 23(8.4,5.575) 24(7.6,5.575) 25(6.8,5.575) 26(6,5.575) 27(5.2,5.575) 28(4.4,5.575) 29(3.6,5.575) 30(2.8,5.575) 31(2,5.575) 32(1.2,5.575) 33(0.4,5.575) 34(-0.4,5.575) 35(-1.2,5.575) 36(-2,5.575) 37(-2.8,5.575) 38(-3.6,5.575) 39(-4.4,5.575) 40(-5.2,5.575) 41(-6,5.575) 42(-6.8,5.575) 43(-7.6,5.575) 44(-8.4,5.575)
  silkscreen extent -9.3,-5.7 9.25,4.45
TestPin [mil] "SingleTest Pin"
  round 60 hole 35: 1(0,0)

## Part data
C1 C2 C3 C4 C5 C6 C7 C8 C9 C10 C11 C12: library part CAP_POLAR, "Polar Capacitor"
C13 C14 C15 C16 C17 C18 C19 C20 C21 C22 C23 C24 C25 C26 C27 C28 C29 C30 C31 C32 C33 C34 C35 C36 C37 C38 C39 C40 C41 C42 C43 C44 C45 C46 C47 C48 C49 C50 C51 C52 C53 C54 C55: library part CAP, "Capacitor"
HDR1 HDR2: "Board-to-Board, Docking Station, 0.80mm (.031\") Pitch, Shielded Receptacle, Vertical, Ultra Low Profile, SMT"
L1 L2 L3 L4: library part Inductor, "Farnell part 323-7989"
LED1 LED2: library part HSMX-C670, "Typical RED GaAs SMD LED Agilent make"
R1 R2 R3 R4 R5 R6 R7 R8 R9 R10 R11 R12 R13 R14 R15: library part RES, "Resistor"
U1: "Stratix 1.5V FPGA, 426 I/Os, 780-Pin FineLine BGA, Speed Grade 7, Industrial Grade"
U2: library part SN74AHC1G04DBVR
U3 U4: "512Kx16Bit SRAM TSOP44"
U5: "SMBus Temperature Sensor with Internal and External Diode Input"

## Free pads (board coordinates)
  round 1 smd far side mask+1: FD2(4.3,56.9) FD3(51.1,50.9) FD4(62.9,27.4) FID1(17.5,24.9)
  round 1 smd mask+1: FD5(10.4,21) FD6(61.8,53.6)
  round 3.2 hole 3.5 unplated: LP(4,34) LP(65,4) LP(65,73)

## Via types
v1: diameter 0.6, hole 0.3, Top Layer to Bottom Layer, 560 vias

## Nets (pads, with @x,y where several pads share a name; then routed paths per layer and width w, separated by ;. In a path a pad name is that pad's centre, name@x,y a point inside that pad or via, vN(x,y) a via of type N, cw(c..) or ccw(c..) an arc to the next point about the centre after c; other vN are vias at no path point)
AUDIO_SPI_CSN: HDR1.11 U1.B25 | length 11.8
  Bottom Layer w0.2: HDR1.11@18.9,60.5 18.9,58.6 23.6,53.9 23.6,51.5 24.1,51 U1.B25@24.1,50.9
BLUE0: HDR1.14 U1.D23 | length 27.2
  Upper w0.2: v1(19.7,69.6) 19.7,66 20.5,65.2 20.5,59.2 24.3,55.5 24.3,49 24.9,48.4 v1(25.6,48.4)
  Bottom Layer w0.2: HDR1.14@19.7,67.2 v1(19.7,69.6) ; v1(25.6,48.4) U1.D23@26.1,48.9
BLUE1: HDR1.16 U1.C23 | length 26.9
  lower w0.2: v1(20.5,70.2) 20.5,66.1 21.3,65.2 21.3,59.1 24.9,55.8 24.9,49.6 25.1,49.4 v1(25.6,49.4)
  Bottom Layer w0.2: HDR1.16@20.5,67.3 v1(20.5,70.2) ; v1(25.6,49.4) U1.C23@26.1,49.9
BOC_CTS: HDR1.13 U1.A25 | length 10.2
  Bottom Layer w0.2: HDR1.13@19.7,60.4 19.7,58.6 24.1,54.2 ; U1.A25@24.1,51.9 24.1,54.1
BOC_RTS: HDR1.17 U1.A24 | length 10.2
  Bottom Layer w0.2: HDR1.17@21.3,60.5 21.3,58.4 25.1,54.7 U1.A24@25.1,51.9
BOC_RX: HDR1.19 U1.B23 | length 11.3
  Bottom Layer w0.2: HDR1.19@22.1,60.5 22.1,58.4 25.6,55.1 25.6,51.4 U1.B23@26.1,50.9
BOC_TX: HDR1.15 U1.B24 | length 11.5
  Bottom Layer w0.2: HDR1.15@20.5,60.5 20.5,58.5 24.6,54.4 24.6,52.5 24.6,51.4 U1.B24@25.1,50.9
BUZZER: HDR2.24 U1.AG23 | length 10.4
  Bottom Layer w0.2: HDR2.24@23.7,16.5 23.7,18 25.6,19.9 25.6,25.4 U1.AG23@26.1,25.9
CAN_RXD: HDR1.4 U1.J25 | length 36.7
  lower w0.2: v1(15.7,70.2) 15.7,65.9 16.5,65.1 16.5,59 20.6,54.9 20.6,47.3 21.3,46.6 25.2,46.6 25.6,46.2 v1(25.6,45.4)
  Bottom Layer w0.2: HDR1.4@15.7,67.3 v1(15.7,70.2) ; U1.J25@24.1,43.9 24.6,44.4 25.4,44.4 25.6,44.6 v1(25.6,45.4)
CAN_TXD: HDR1.2 U1.H25 | length 32.9
  lower w0.2: v1(14.9,69.5) 14.9,65.9 15.7,65.1 15.7,59.1 20.2,54.7 20.2,47.117 21.217,46.1 24.4,46.1 24.6,45.9 v1(24.6,45.4)
  Bottom Layer w0.2: HDR1.2@14.9,67.3 v1(14.9,69.5) ; U1.H25@24.1,44.9 v1(24.6,45.4)
FPGA_AUX0: HDR1.86 U1.C5 | length 24.6
  Upper w0.2: v1(45.6,50.4) 45.6,52.3 47.3,54.1 47.3,64.6 48.5,65.8 v1(48.5,69.7)
  Bottom Layer w0.2: U1.C5@44.1,49.9 44.6,50.4 v1(45.6,50.4) ; HDR1.86@48.5,67.3 v1(48.5,69.7)
FPGA_AUX1: HDR1.88 U1.C4 | length 26.3
  Upper w0.2: v1(45.6,49.4) 46.1,49.4 46.4,49.8 46.4,52.3 48.8,54.7 48.8,65.2 49.3,65.7 v1(49.3,70.3)
  Bottom Layer w0.2: U1.C4@45.1,49.9 v1(45.6,49.4) ; HDR1.88@49.3,67.4 v1(49.3,70.3)
FPGA_AUX2: HDR1.90 U1.J4 | length 34.3
  Upper w0.2: v1(43.6,45.4) 43.6,46.3 44.1,46.8 48.2,46.8 49.6,48.2 49.6,65 50.1,65.5 v1(50.1,69.7)
  Bottom Layer w0.2: v1(43.6,45.4) 43.6,44.6 43.8,44.4 44.6,44.4 U1.J4@45.1,43.9 ; HDR1.90@50.1,67.4 v1(50.1,69.7)
FPGA_AUX3: HDR1.92 U1.H4 | length 33.3
  Upper w0.2: v1(44.6,45.4) 44.6,45.9 44.9,46.2 48.5,46.2 50.1,47.8 50.1,50.1 50.1,64.8 50.9,65.6 v1(50.9,70.3)
  Bottom Layer w0.2: v1(44.6,45.4) U1.H4@45.1,44.9 ; HDR1.92@50.9,67.3 v1(50.9,70.3)
FPGA_CCLK: HDR1.66 R14.2 | length 6.5
  Top Layer w0.2: R14.2@39.25,72.5 v1(40.5,72.5)
  Bottom Layer w0.2: HDR1.66@40.5,67.3 v1(40.5,72.5)
FPGA_CCLK#: R14.1 U1.F16 | length 30.1
  Top Layer w0.2: v1(36.3,72.6) R14.1@37.5,72.6
  Upper w0.2: v1(32.6,51.4) 32,51.4 31.6,51.8 31.6,60.5 35.7,64.6 35.7,72.4 35.9,72.6 v1(36.3,72.6)
  Bottom Layer w0.2: v1(32.6,51.4) 32.6,47.4 U1.F16@33.1,46.9
FPGA_CLK: HDR2.2 U1.R27 | length 30
  Top Layer w0.2: v1(16.7,30.2) 17,29.9 19.5,29.9 20.3,30.8 20.3,37.1 20.8,37.6 21.8,37.6 v1(22.6,38.4)
  Bottom Layer w0.2: HDR2.2@14.9,16.5 14.9,17.7 14.9,21.1 12.9,23.1 12.9,26.3 v1(16.7,30.2) ; U1.R27@22.1,37.9 v1(22.6,38.4)
FPGA_CLK_1: HDR1.30 U1.P27 | length 38.7
  Top Layer w0.2: v1(21.6,38.4) 21.6,38.9 22.2,39.5 26,39.5 26.3,39.8 26.3,51.1 25.8,51.7 25.7,69.1 v1(26.1,69.6)
  Bottom Layer w0.2: v1(21.6,38.4) U1.P27@22.1,38.9 ; HDR1.30@26.1,67.3 v1(26.1,69.6)
FPGA_CLK_2: HDR1.32 U1.P25 | length 37.9
  Top Layer w0.2: v1(24.6,38.4) 24.6,39.1 26.4,39.1 26.9,39.6 26.9,51.1 26.3,51.8 26.3,68.6 26.9,69.2 v1(26.9,70.2)
  Bottom Layer w0.2: U1.P25@24.1,38.9 v1(24.6,38.4) ; HDR1.32@26.9,67.3 v1(26.9,70.2)
FPGA_DIN: HDR1.64 U1.H12 | length 28.5
  lower w0.2: v1(35.6,45.4) 36.129,45.4 36.3,45.571 36.3,60.9 39.7,64.3 v1(39.7,68.8)
  Bottom Layer w0.2: v1(35.6,45.4) 36.6,45.4 U1.H12@37.1,44.9 ; HDR1.64@39.7,67.4 v1(39.7,68.8)
FPGA_DONE: HDR1.74 R9.2 U1.G17 U2.2 | length 173.8
  Top Layer w0.2: U2.2@25.675,5 U2.2@25.775,5.1 ; U2.2@25.825,5 R9.2@29.75,5 ; 28,5 28,5.8 28.6,6.3 38.5,6.3 39.7,7.4 39.7,8.3 51.5,20.7 55.3,20.7 63.7,29.1 v1(64.8,29.1)
  lower w0.2: v1(31.6,46.4) 31.1,46.4 30.9,46.7 ; 39.7,70.6 39.7,73.9 41.2,75.5 53,75.5 56.1,72.4 56.1,60.4 66.5,50 66.5,29.5 66.1,29.1 v1(64.8,29.1) ; v1(43.7,68.9) 43.7,69.9 43,70.6 38.2,70.6 34.9,67.5 34.9,64.9 30.9,60.9 ; 30.9,46.7 30.9,60.9 ; 30.9,46.7 30.9,60.9
  Bottom Layer w0.2: v1(31.6,46.4) U1.G17@32.1,45.9 ; HDR1.74@43.7,67.4 v1(43.7,68.9)
FPGA_INIT: HDR1.68 R11.2 U1.M16 | length 39.9
  Top Layer w0.2: R11.2@41.3,65.25 v1(41.3,69.4)
  lower w0.2: v1(33.6,41.4) 33.6,42.1 32.8,42.9 32.8,49.9 33.6,50.8 33.6,60 37.3,63.9 37.3,67.6 39.3,69.4 v1(41.3,69.4)
  Bottom Layer w0.2: U1.M16@33.1,40.9 v1(33.6,41.4) ; HDR1.68@41.3,67.4 v1(41.3,69.4)
FPGA_M0: HDR1.60 U1.AC16 | length 110
  Top Layer w0.2: v1(33.6,30.4) 33.6,31.2 34.1,31.7 v1(57.1,31.7)
  Upper w0.2: v1(38.9,71.3) 38.9,73.1 41.2,75.5 53,75.5 56.1,72.4 56.1,60.4 66.5,50 66.5,29.5 65.5,28.4 61.2,28.4 58.9,31.7 v1(57.1,31.7)
  Bottom Layer w0.2: U1.AC16@33.1,29.9 v1(33.6,30.4) ; HDR1.60@38.1,67.2 38.1,70.8 38.5,71.3 v1(38.9,71.3)
FPGA_M1: HDR1.58 U1.W17 | length 114.7
  Top Layer w0.2: v1(37.6,30.4) 56.3,30.4 56.5,30.2 v1(57.8,30.2)
  lower w0.2: v1(37.3,71) 37.3,72.3 37.9,72.9 40.9,76 53.3,76 56.7,72.5 56.7,60.5 67.1,50.2 67,29.1 65.6,27.7 60.8,27.7 59,30.2 v1(57.8,30.2)
  Bottom Layer w0.2: U1.W17@32.1,33.9 32.6,33.4 33.347,33.4 33.6,33.147 33.6,31.623 33.823,31.4 37.338,31.4 37.6,31.138 v1(37.6,30.4) ; HDR1.58@37.3,67.4 v1(37.3,71)
FPGA_M2: HDR1.56 U1.AB15 | length 117
  Top Layer w0.2: v1(34.6,30.4) 34.6,30.9 34.8,31.1 56.3,31.1 56.5,30.9 v1(58.5,30.9)
  Upper w0.2: v1(36.5,70.2) 36.5,71.5 40.9,76 ; 37,72 40.9,76 ; v1(58.5,30.9) 60.8,27.7 65.6,27.7 67,29.1 67.1,50.2 56.7,60.5 56.7,72.5 53.3,76 40.9,76
  Bottom Layer w0.2: U1.AB15@34.1,30.9 v1(34.6,30.4) ; HDR1.56@36.5,67.4 v1(36.5,70.2)
FPGA_PROGRAM: HDR1.62 R10.2 U1.L16 | length 40.1
  Top Layer w0.2: R10.2@38.9,65.25 v1(38.9,69.9)
  lower w0.2: v1(32.6,41.4) 32.2,41.8 32.2,49.9 31.6,50.4 31.6,59.4 36.5,64.2 36.5,68 38.4,69.9 v1(38.9,69.9)
  Bottom Layer w0.2: v1(32.6,41.4) U1.L16@33.1,41.9 ; HDR1.62@38.9,67.5 v1(38.9,69.9)
FPGA_TCK: HDR1.72 TP7.1 U1.K12 | length 37.1
  Upper w0.2: v1(36.6,43.4) 36.9,43.8 36.9,60.6 42.9,66.6 v1(42.9,69.5)
  Bottom Layer w0.2: v1(36.6,43.4) U1.K12@37.1,42.9 ; HDR1.72@42.9,67.3 v1(42.9,69.5) 42.9,71.1 42.9,71.3 TP7.1@45.2,74.2
FPGA_TDI: HDR1.78 TP9.1 U1.G13 | length 39.5
  lower w0.2: v1(37.6,46.4) 39,46.4 39.6,47.1 39.6,61.1 45.3,66.7 v1(45.3,68.9)
  Bottom Layer w0.2: U1.G13@36.1,45.9 36.6,46.4 v1(37.6,46.4) ; TP9.1@50.2,73.2 47.1,73.2 45.3,71.1 v1(45.3,68.9) ; v1(45.3,68.9) HDR1.78@45.3,67.3 v1(45.3,68.9)
FPGA_TDO: HDR1.54 R2.1 TP8.1 | length 15.8
  Top Layer w0.2: TP8.1@35.7,73.9 35.7,74.8 36,75.1 R2.1@37.45,75.1
  Bottom Layer w0.2: HDR1.54@35.7,67.3 35.7,69.6 35.7,73.8 HDR1.54@35.7,67.3
FPGA_TDO#: R2.2 U1.H13 | length 36
  Top Layer w0.2: R2.2@39.35,75.1 40.4,75.1 41.2,74.3 v1(41.2,71.3) v1@41.3,71.2
  Upper w0.2: v1(35.6,44.4) 36.1,44.4 36.3,44.6 36.3,60.9 40.5,65.1 40.5,71.3 v1(41.2,71.3)
  Bottom Layer w0.2: v1(35.6,44.4) U1.H13@36.1,44.9
FPGA_TMS: HDR1.70 TP6.1 U1.F13 | length 32.8
  lower w0.2: v1(37.6,47.4) 36.9,48.1 36.9,60.6 42.1,65.8 v1(42.1,68.9)
  Bottom Layer w0.2: U1.F13@36,46.9 U1.F13@36.1,46.9 36.6,47.4 v1(37.6,47.4) ; HDR1.70@42.1,67.4 42.1,73.5 TP6.1@42.7,74.2